# Allegro board StepperNug RR v1.brd
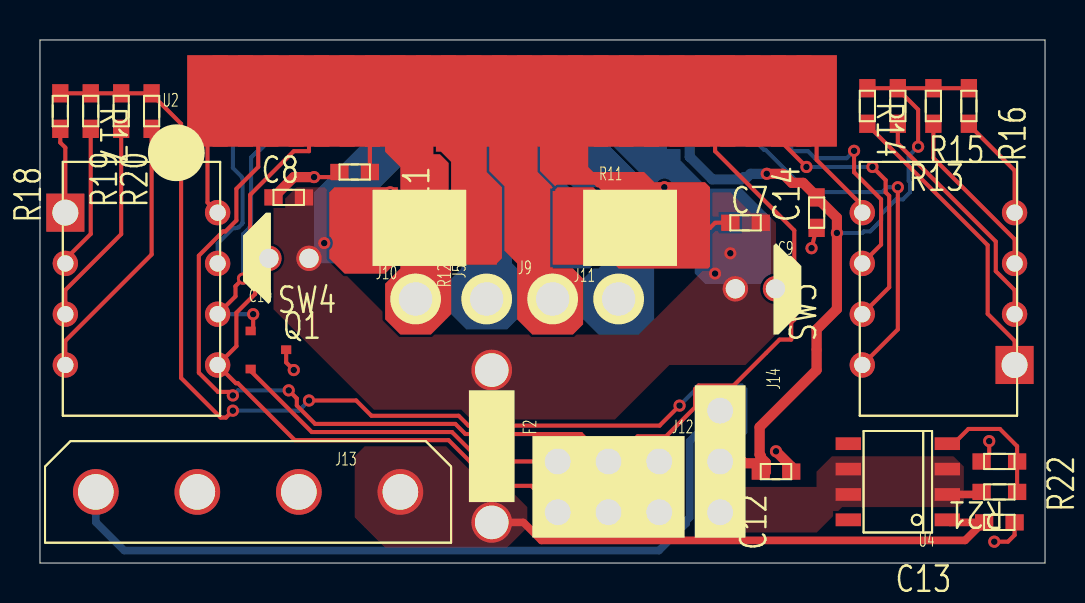
[diagram p0: board, top side]
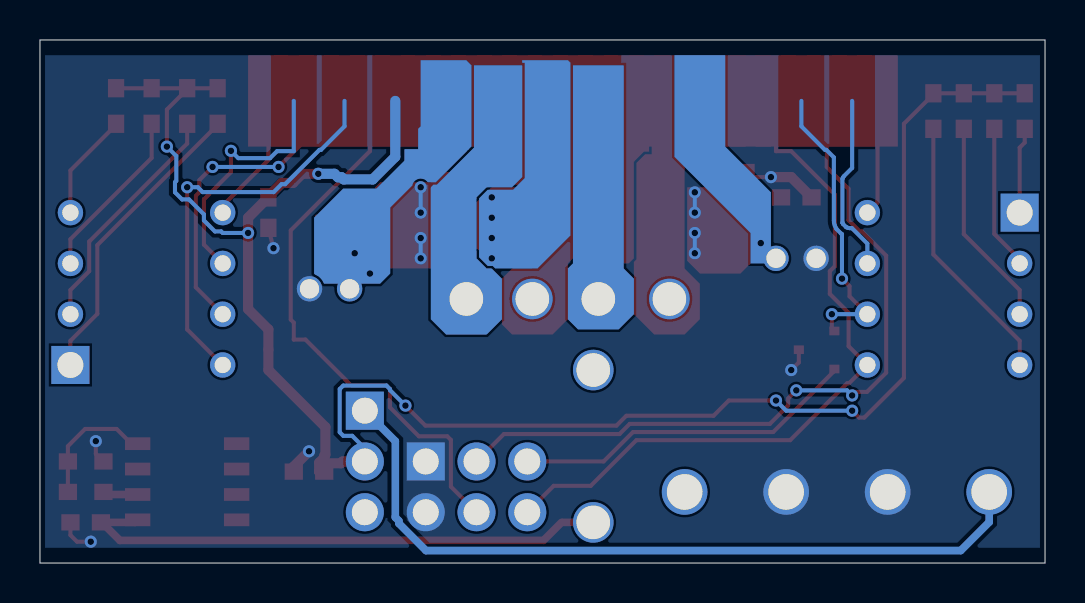
[diagram p1: board, bottom side, seen from below]

Outline 50.29 x 26.16 mm; copper layers: TOP, BOTTOM. Coordinates in mm from the lower left corner of the outline.
Outline path: 0,26.16 50.29,26.16 50.29,0 0,0 0,26.16

## Placement (name value [footprint] x y rotation side)
C7  1u  [SMD_0603_CAP]  35.31 17.02 0 top
C8  1u  [SMD_0603_CAP]  12.45 18.29 0 top
C9  47u  [THRU_ELECTRO]  35.81 13.72 180 top
C10  47u  [THRU_ELECTRO]  12.45 15.24 0 top
C11  330pf  [SMD_0603_CAP]  15.75 19.56 0 top
C12  2.2uf  [SMD_0603_CAP]  36.83 4.57 180 top
C13  2.2uf  [SMD_0603_CAP]  48.01 2.03 180 top
C14  2.2uf  [SMD_0603_CAP]  38.86 17.53 90 top
F2  FUSE  [THRU_FUSE]  22.61 5.84 270 top
J5  Wiremount  [WIRE_HOLE]  22.35 13.21 0 top
J9  Wiremount  [WIRE_HOLE]  25.65 13.21 0 top
J10  Wiremount  [WIRE_HOLE]  18.8 13.21 0 top
J11  Wiremount  [WIRE_HOLE]  28.96 13.21 0 top
J12  CON6A  [CONN_6]  30.99 5.08 270 top
J13  4 HEADER  [CONN_4_DISKDRIVE]  18.03 3.56 180 top
J14  HEADER 3  [CONN_3]  34.04 7.62 270 top
Q1  Fet  [SOT23]  11.43 10.67 0 top
R11  0.166  [SMD_2512_RES]  26.42 16.76 0 top
R12  0.166  [SMD_2512_RES]  22.1 16.76 180 top
R13  1k  [SMD_0603_RES]  42.93 22.86 270 top
R14  1k  [SMD_0603_RES]  41.4 22.86 270 top
R15  1k  [SMD_0603_RES]  44.7 22.86 270 top
R16  1k  [SMD_0603_RES]  46.48 22.86 270 top
R17  1k  [SMD_0603_RES]  2.54 22.61 270 top
R18  1k  [SMD_0603_RES]  1.02 22.61 270 top
R19  1k  [SMD_0603_RES]  4.06 22.61 270 top
R20  1k  [SMD_0603_RES]  5.59 22.61 270 top
R21  1k  [SMD_0603_RES]  48.01 3.56 180 top
R22  1k  [SMD_0603_RES]  48.01 5.08 0 top
SW3  DipSw-4  [DIPSW-4]  44.96 13.72 180 top
SW4  DipSw-4  [DIPSW-4]  5.08 13.72 0 top
U2  TB6560AHQ  [HZIP_25_SMT]  8.38 23.11 0 top
U4  LM317/SO  [SOIC8]  42.93 4.06 180 top

## Library data of the parts
C7 C8 C11-C14 = C
C9 C10 = C_elect_0
F2 = FUSE_0
J5 J9-J11 = Wiremount
J12 = CON6A
J13 = 4 HEADER
J14 = HEADER 3
Q1 = MOSFET N DGS
R11-R22 = R
SW3 SW4 = DipSw-4
U2 = TB6560AHQ
U4 = LM317/SO_1: Tolerance: ***; User Part Number: ***

## Footprints (pads in the part's own frame, mm; a bottom-side part is the same pattern mirrored in y, then rotated)
CONN_3
  rect 1.905x1.905 hole 1.295: 1(0,0)
  round 1.905 hole 1.295: 2(2.54,0) 3(5.08,0)
CONN_4_DISKDRIVE
  round 2.286 hole 1.778: 1(0,0) 2(5.08,0) 3(10.16,0) 4(15.24,0)
CONN_6
  rect 1.905x1.905 hole 1.295: 1(0,0)
  round 1.905 hole 1.295: 2(2.54,0) 3(0,-2.54) 4(2.54,-2.54) 5(0,-5.08) 6(2.54,-5.08)
DIPSW-4
  rect 1.905x1.905 hole 1.295: 1(-3.81,3.81)
  round 1.27 hole 0.813: 2(-3.81,1.27) 3(-3.81,-1.27) 4(-3.81,-3.81) 5(3.81,-3.81) 6(3.81,-1.27) 7(3.81,1.27) 8(3.81,3.81)
HZIP_25_SMT
  rect 2.032x4.572 smd: 1(0,0) 2(1.27,0) 3(2.54,0) 4(3.81,0) 5(5.08,0) 6(6.35,0) 7(7.62,0) 8(8.89,0) 9(10.16,0) 10(11.43,0) 11(12.7,0) 12(13.97,0) 13(15.24,0) 14(16.51,0) 15(17.78,0) 16(19.05,0) 17(20.32,0) 18(21.59,0) 19(22.86,0) 20(24.13,0) 21(25.4,0) 22(26.67,0) 23(27.94,0) 24(29.21,0) 25(30.48,0)
SMD_0603_CAP
  rect 0.914x0.813 smd: 1(-0.762,0) 2(0.762,0)
SMD_0603_RES
  rect 0.914x0.813 smd: 1(-0.889,0) 2(0.889,0)
SMD_2512_RES
  rect 1.524x3.683 smd: 1(0,0) 2(6.223,0)
SOIC8
  rect 1.27x0.635 smd: 1(-2.477,1.905) 2(-2.477,0.635) 3(-2.477,-0.635) 4(-2.477,-1.905) 5(2.477,-1.905) 6(2.477,-0.635) 7(2.477,0.635) 8(2.477,1.905)
SOT23
  rect 0.508x0.432 smd: 1(-0.889,0.94) 2(-0.889,-0.965) 3(0.889,0)
THRU_ELECTRO
  round 1.27 hole 0.965: 1(-0.991,0) 2(1.016,0)
THRU_FUSE
  round 2.032 hole 1.676: 1(-3.81,0) 2(3.81,0)
WIRE_HOLE
  round 2.032 hole 1.676: 1(0,0)

## Nets
VCC: C12.2 C14.2 J14.2 R13.1 R14.1 R15.1 R16.1 R17.1 R18.1 R19.1 R20.1 U2.20(VDD)
VCC_MOLEX: J13.4 J14.1
VCC_REG: J14.3 R21.2 U4.2(VOUT) U4.3(VOUT.) U4.6(.VOUT) U4.7(.VOUT.)
0: C7.1 C8.1 C9.1(-) C10.1(-) C11.1 C12.1 C13.1 C14.1 J12.1 J12.2 J13.2 J13.3 Q1.3(S) R11.2 R12.2 R22.1 U2.6(SGND) U2.10(MOTGND#10) U2.15(MOTGND#15)
DIR: J12.4 U2.21(DIR)
ENABLE__: Q1.1(D) SW4.6(IN3) U2.4(ENA)
FAULT: U2.19(PROTECT)
HOME: U2.17(MO)
RESET__: J12.6 SW4.5(IN4) U2.5(RES)
STEP: J12.3 U2.3(CLK)
VMOT: C13.2 F2.2 J13.1 U4.1(VIN)
N31928: R12.1 U2.11(B_CRNT_SNS)
N31936: C7.2 C8.2 C9.2(+) C10.2(+) F2.1 U2.8(VMB) U2.18(VMA)
N31952: R11.1 U2.14(A_CRNT_SNS)
N32080: J5.1(.) U2.12(OUT_BP)
N32094: J9.1(.) U2.13(OUT_AM)
N32098: J11.1(.) U2.16(OUT_AP)
N32112: J10.1(.) U2.9(OUT_BM)
N32348: SW4.8(IN1) U2.1(TQ2)
N32360: SW4.7(IN2) U2.2(TQ1)
N32392: SW3.5(IN4) U2.25(DCY1)
N32400: SW3.8(IN1) U2.22(M2)
N32600: R14.2 SW3.1(TRM1)
N32604: R13.2 SW3.2(TRM2)
N32608: R15.2 SW3.3(TRM3)
N32612: R16.2 SW3.4(TRM4)
N32620: SW3.6(IN3) U2.24(DCY2)
N32632: SW3.7(IN2) U2.23(M1)
N32908: R21.1 R22.2 U4.4(ADJ)
N32992: J12.5 Q1.2(G)
N320106: C11.2 U2.7(OSC)
N324520: R18.2 SW4.1(TRM1)
N324521: R17.2 SW4.2(TRM2)
N324522: R19.2 SW4.3(TRM3)
N324523: R20.2 SW4.4(TRM4)

Pads without a net: U4 5 8

## Via types
v1: diameter 0.61, hole 0.33, TOP to BOTTOM, 35 vias

## Routing (per net, layer and track width the routed paths; a pad name or vN(x,y) marks a point on that pad's centre or on a via; arc(x,y) is an arc through that point)
VCC: length 99.2
  TOP w0.203: v1(13.46,8.13) 15.82,8.13 16.59,7.36 20.95,7.36 21.44,6.87 31,6.87 v1(32,7.87) ; v1(43.94,20.83) 43.94,22.68 42.93,23.7 R13.1 ; R16.1 R15.1 R13.1 ; v1(9.65,7.62) 9.31,7.27 9.04,7.27 7.06,9.26 7.06,21.97 5.59,23.44 5.59,23.49 1.02,23.49 ; R13.1 R14.1
  TOP w0.508: 36.32,4.57 C12.2 ; 36.32,4.57 35.9,4.99 35.23,4.99 35.14,5.08 J14.2 ; 36.32,4.57 36.32,5.02 36.07,5.27 36.07,5.36 36.01,5.42 36.01,6.8 38.86,9.65 38.86,11.68 39.88,12.7 v1(39.88,16.51) 39.88,17.27 C14.2 38.86,18.34 38.19,19.01 37.63,19.01 37.17,19.47 v1(36.37,19.47)
  BOTTOM w0.203: v1(13.46,8.13) 12.95,7.62 v1(9.65,7.62) ; v1(43.94,20.83) 43.47,20.36 43.47,19.11 43.54,19.05 43.54,18.54 43.18,18.19 42.83,18.19 42.09,17.44 42.09,17.14 41.54,16.59 41.22,16.59 41.15,16.51 v1(39.88,16.51) ; J14.2 34.04,5.73 34.67,6.36 35.11,6.36 35.29,6.54 35.29,8.7 35.11,8.88 32.96,8.88 32.78,8.7 32.78,8.65 v1(32,7.87)
  BOTTOM w0.508: U2.20 32.51,20.32 33.64,19.19 35.09,19.19 35.2,19.29 35.38,19.29 35.55,19.47 v1(36.37,19.47)
VCC_MOLEX: length 38.5
  BOTTOM w0.381: J13.4 2.79,2.05 4.22,0.62 30.97,0.62 32.33,1.98 32.33,2.11 32.51,2.29 32.51,6.1 J14.1
VCC_REG: length 1.8
  TOP w0.381: U4.2 46.99,3.43 R21.2
0: length 20.5
  TOP w0.203: C14.1 v1(38.61,15.75) ; R22.1 47.5,5.46 v1(47.5,6.1) ; v1(12.7,9.65) 12.32,10.03 12.32,10.67 ; C13.1 48.77,1.4 48.44,1.07 v1(47.75,1.07) ; 31.24,16.36 31.65,16.76 R11.2 33.53,16.76 33.78,17.02 C7.1 ; v1(31.24,15.24) v1(31.24,16.26) ; v1(17.53,17.53) v1(17.53,16.51) ; v1(13.72,19.3) 14.68,19.3 14.94,19.56 C11.1
  TOP w0.508: v1(13.72,19.3) 12.7,19.3 C8.1 ; C12.1 37.59,4.83 v1(36.83,5.59)
  BOTTOM w0.203: v1(17.53,16.51) v1(17.53,15.49) ; v1(31.24,17.53) v1(31.24,18.8) ; v1(17.53,18.54) v1(17.53,17.53) ; 36.58,13.72 C9.1 36.83,13.72 ; v1(31.24,16.26) v1(31.24,15.24)
DIR: length 28.3
  TOP w0.203: J12.4 29.73,3.82 29.73,6.16 29.91,6.34 31.33,6.34 32.78,7.79 32.78,8.7 32.96,8.88 34.71,8.88 36.34,10.51 37.01,11.18 37.59,11.18 37.59,12.02 37.74,12.18 37.74,16.64 33.78,20.6 U2.21
ENABLE__: length 14.7
  TOP w0.203: Q1.1 10.67,11.73 v1(10.67,12.45) ; SW4.6 9.78,13.34 9.78,13.85 v1(10.16,14.22)
  BOTTOM w0.203: SW4.6 v1(10.67,12.45) ; v1(10.16,14.22) 10.16,16.45 10.21,16.48 10.43,16.7 10.45,16.74 10.52,16.88 10.56,17.03 10.57,17.14 10.57,20.29 10.94,20.67 11.01,20.67 12.19,21.84 U2.4
RESET__: length 35.8
  TOP w0.203: U2.5 13.46,20.6 12.7,20.6 10.52,18.41 10.52,14.85 10.77,14.6 10.77,13.46 9.83,12.52 9.83,10.85 SW4.5 9.8,8.99 9.9,8.99 12.75,6.14 20.45,6.14 22.73,3.86 24.59,3.86 J12.6
STEP: length 37.8
  TOP w0.203: v1(12.45,8.64) 12.85,8.23 12.85,7.88 13.77,6.96 20.78,6.96 21.29,6.45 27.08,6.45 J12.3 ; v1(9.65,8.38) 9.65,8.55 9.66,8.56 8.91,8.56 7.95,9.52 7.95,15.38 9.16,16.59 9.28,16.59 9.83,17.14 9.83,18.72 10.92,19.81 U2.3
  BOTTOM w0.203: v1(12.45,8.64) 9.91,8.64 v1(9.65,8.38)
VMOT: length 27.2
  TOP w0.381: U4.1 45.53,2.03 47.19,2.03 ; 47.19,2.03 C13.2 ; 47.19,2.03 46.29,1.13 25.1,1.13 24.19,2.03 ; F2.2 24.13,2.03
N31936: length 1.1
  BOTTOM w0.203: C10.2 v1(14.22,16)
  vias: v1(33.78,14.48) v1(34.54,15.49)
N31952: length 4.7
  TOP w0.203: R11.1 27.41,16.76 27.69,17.04 v1(27.69,17.27) v1(27.69,18.29) ; v1(27.69,16.26) v1(27.69,15.24)
  BOTTOM w0.203: v1(27.69,17.27) v1(27.69,16.26)
N32348: length 5.8
  TOP w0.203: U2.1 8.38,18.03 SW4.8
N32360: length 9
  BOTTOM w0.203: SW4.7 8.89,15.98 9.66,16.75 9.77,16.75 9.85,16.76 9.93,16.79 9.96,16.81 10.11,16.96 10.14,17.02 10.14,17.02 10.14,19.22 10.11,19.28 10.07,19.34 9.65,19.76 U2.2
N32392: length 6.5
  TOP w0.203: U2.25 38.86,20.17 41.15,17.88 SW3.5
N32400: length 20.2
  TOP w0.203: v1(42.93,18.8) 42.93,11.68 SW3.8
  BOTTOM w0.203: U2.22 35.05,21.84 36.23,20.67 36.31,20.67 38.02,18.95 38.2,18.95 38.6,18.55 42.15,18.55 42.39,18.8 v1(42.93,18.8)
N32600: length 15.1
  TOP w0.203: R14.2 41.4,21.92 47.42,15.9 47.42,12.46 48.77,11.12 SW3.1
N32604: length 11.9
  TOP w0.203: R13.2 42.93,20.98 47.83,16.08 47.83,14.6 48.77,13.66 SW3.2
N32608: length 8.7
  TOP w0.203: R15.2 44.7,20.26 48.77,16.2 SW3.3
N32612: length 5.4
  TOP w0.203: SW3.4 48.77,19.63 46.48,21.92 R16.2
N32620: length 12.5
  TOP w0.203: SW3.6 42.09,15.93 42.09,18.2 40.74,19.55 v1(40.74,20.62)
  BOTTOM w0.203: U2.24 37.59,20.6 38.43,20.6 38.78,20.25 40.37,20.25 v1(40.74,20.62)
N32632: length 15.7
  TOP w0.203: U2.23 36.32,21.84 v1(38.35,19.81) ; v1(41.66,19.81) 42.32,19.15 42.32,18.54 42.49,18.37 42.49,13.79 SW3.7
  BOTTOM w0.203: v1(41.66,19.81) v1(38.35,19.81)
N32908: length 6.4
  TOP w0.203: U4.4 45.72,5.97 46.46,6.71 48.03,6.71 48.9,5.84 R22.2 R21.1
N32992: length 17.4
  TOP w0.203: J12.5 22.09,5.08 20.61,6.55 13.6,6.55 10.58,9.57 10.58,9.7 Q1.2
N320106: length 3.8
  TOP w0.203: U2.7 16.51,22.61 C11.2
N324520: length 4.3
  TOP w0.203: R18.2 1.02,21.03 1.27,20.78 SW4.1
N324521: length 7.3
  TOP w0.203: R17.2 2.54,16.46 1.27,15.19 SW4.2
N324522: length 10.4
  TOP w0.203: SW4.3 1.27,13.66 4.06,16.45 R19.2
N324523: length 13.6
  TOP w0.203: R20.2 5.59,15.43 1.27,11.12 SW4.4

## Copper pours and planes (outline as drawn; the poured copper is in the pictures)
VCC_REG on TOP: 46.23,3.05 46.23,4.83 45.72,5.33 39.62,5.33 38.86,4.57 38.86,3.81 33.27,3.81 32.77,3.3 32.77,2.03 33.27,1.52 38.86,1.52 40.13,2.79 45.97,2.79
(no net) on TOP: 18.03,18.8 14.73,18.8 14.48,18.54 14.48,15.24 15.24,14.48 17.27,14.48 18.03,15.24
(no net) on TOP: 17.27,24.89 17.27,20.57 18.03,19.81 18.03,14.73 17.27,13.97 17.27,12.19 18.03,11.43 19.56,11.43 20.57,12.45 20.57,20.07 19.81,20.83 19.81,24.89
(no net) on TOP: 25.65,14.99 27.69,14.99 28.45,15.75 28.45,18.03 27.69,18.8 25.91,18.8 25.65,18.54
(no net) on TOP: 22.86,14.99 20.83,14.99 20.57,15.24 20.57,20.07 20.07,20.57 19.81,20.57 19.81,24.89 22.35,24.89 22.35,19.56 23.11,18.8 23.11,15.24
(no net) on TOP: 26.67,11.43 24.64,11.43 23.88,12.19 23.88,14.99 23.11,15.75 23.11,18.8 22.35,19.56 22.35,24.89 24.89,24.89 24.89,19.56 25.65,18.8 25.65,14.73 26.67,14.73 27.18,14.22 27.18,11.94
(no net) on TOP: 24.89,24.89 24.89,19.56 25.65,18.8 27.94,18.8 28.45,18.29 28.45,15.24 28.96,14.73 33.53,14.73 33.53,18.8 33.27,19.05 30.73,19.05 30.23,19.56 27.69,19.56 27.43,19.81 27.43,24.89
(no net) on BOTTOM: 23.62,24.89 23.62,16.51 25.4,14.73 27.94,14.73 28.45,15.24 28.45,18.29 27.94,18.8 26.67,18.8 26.16,19.3 26.16,25.15 23.88,25.15
(no net) on BOTTOM: 28.7,24.89 28.7,20.83 30.48,19.05 31.5,19.05 32.77,17.78 32.77,14.48 33.27,13.97 36.07,13.97 36.58,14.48 36.58,17.27 34.8,19.05 34.04,19.05 31.24,21.84 31.24,25.15 28.96,25.15
(no net) on BOTTOM: 16,25.4 18.54,25.4 18.54,20.32 14.73,16.51 14.73,14.99 13.97,14.99 13.72,15.24 13.72,18.54 16,20.83
(no net) on BOTTOM: 21.08,24.89 21.08,14.73 20.57,14.22 20.57,12.45 21.34,11.68 23.37,11.68 23.88,12.19 23.88,14.73 23.62,14.99 23.62,24.89
(no net) on BOTTOM: 29.97,11.43 27.94,11.43 27.18,12.19 27.18,14.22 27.69,14.73 27.94,14.73 28.45,15.24 28.45,18.29 27.94,18.8 26.67,18.8 26.16,19.3 26.16,24.89 28.7,24.89 28.7,20.83 30.73,18.8 30.73,12.19
0 on TOP (solid shape): 17.91,15.11 17.27,14.48 15.24,14.48 14.48,15.24 14.48,15.65 14.66,16 14.48,16.35 14.48,18.54 14.73,18.8 17.91,18.8
0 on TOP (solid shape): 27.43,19.81 27.69,19.56 30.23,19.56 30.73,19.05 33.27,19.05 33.53,18.8 33.53,14.83 33.48,14.78 33.43,14.73 28.96,14.73 28.45,15.24 28.45,15.57 28.58,15.7 28.58,18.09 28.45,18.21 28.45,18.29 27.94,18.8 27.87,18.8 27.74,18.92 25.86,18.92 25.78,18.85 25.02,19.61 25.02,24.89 27.43,24.89
0 on BOTTOM: 0.25,25.4 0.25,0.76 50.04,0.76 50.04,25.4
VMOT on TOP: 24.38,2.79 24.38,1.78 23.37,0.76 17.27,0.76 15.75,2.29 15.75,5.33 16.26,5.84 20.32,5.84 22.61,3.56 23.62,3.56
N31928 on TOP (solid shape): 22.35,19.56 23.11,18.8 23.11,15.24 22.86,14.99 20.83,14.99 20.57,15.24 20.57,20.07 20.07,20.57 19.81,20.57 19.81,24.89 22.35,24.89
N31936 on BOTTOM (solid shape): 18.54,20.32 14.73,16.51 14.73,14.99 13.97,14.99 13.72,15.24 13.72,18.54 15.87,20.7 15.88,20.7 16,20.83 16,25.4 18.54,25.4
N31936 on BOTTOM (solid shape): 31.24,21.84 31.37,21.72 31.37,20.7 32.05,20.7 32.05,20.13 33.45,18.73 35.12,18.73 36.58,17.27 36.58,14.48 36.52,14.42 36.27,14.26 36.1,14.01 36.1,14 36.07,13.97 33.27,13.97 32.77,14.48 32.77,17.78 31.67,18.88 31.66,18.89 31.33,19.22 30.89,19.05 30.48,19.05 28.7,20.83 28.7,24.89 28.96,25.15 31.24,25.15
N31936 on TOP: 33.53,18.54 34.54,18.54 35.56,17.53 36.32,17.53 36.83,17.02 36.83,11.43 35.31,9.91 31.5,9.91 28.7,7.11 17.27,7.11 11.68,12.7 11.68,17.78 12.7,18.8 14.22,18.8 14.73,18.29 14.73,14.99 18.29,11.43 29.97,11.43 33.53,14.99
N31952 on TOP (solid shape): 28.45,18.03 28.45,15.75 27.69,14.99 25.78,14.99 25.78,18.67 25.91,18.8 27.69,18.8
N31952 on BOTTOM (solid shape): 26.16,25.02 26.03,25.02 26.03,19.25 26.62,18.67 27.89,18.67 28.32,18.24 28.32,15.29 27.89,14.86 27.63,14.86 27.51,14.73 25.4,14.73 23.75,16.38 23.75,25.02 23.88,25.15 26.16,25.15
N32080 on BOTTOM (solid shape): 23.62,14.99 23.88,14.73 23.88,12.19 23.37,11.68 21.34,11.68 20.57,12.45 20.57,14.22 21.08,14.73 21.08,24.89 23.62,24.89
N32094 on TOP (solid shape): 24.89,19.56 25.63,18.82 25.64,18.76 25.59,18.73 25.53,18.73 25.53,14.79 25.65,14.79 25.65,14.73 26.67,14.73 27.18,14.22 27.18,11.94 26.67,11.43 24.64,11.43 23.88,12.19 23.88,14.99 23.24,15.62 23.24,18.85 22.48,19.61 22.48,24.89 24.89,24.89
N32098 on BOTTOM (solid shape): 28.57,20.78 30.43,18.92 30.61,18.92 30.73,18.8 30.73,12.19 29.97,11.43 27.94,11.43 27.18,12.19 27.18,14.22 27.69,14.73 27.94,14.73 28.45,15.24 28.45,18.29 27.94,18.8 26.67,18.8 26.16,19.3 26.16,24.89 28.57,24.89
N32112 on TOP (solid shape): 19.68,20.45 20.01,20.45 20.45,20.01 20.45,15.19 20.57,15.06 20.57,12.45 19.56,11.43 18.03,11.43 17.27,12.19 17.27,13.97 18.03,14.73 18.03,19.81 17.27,20.57 17.27,24.89 19.68,24.89
